# EAGLE board Board1 (EAGLE 9.3.2)
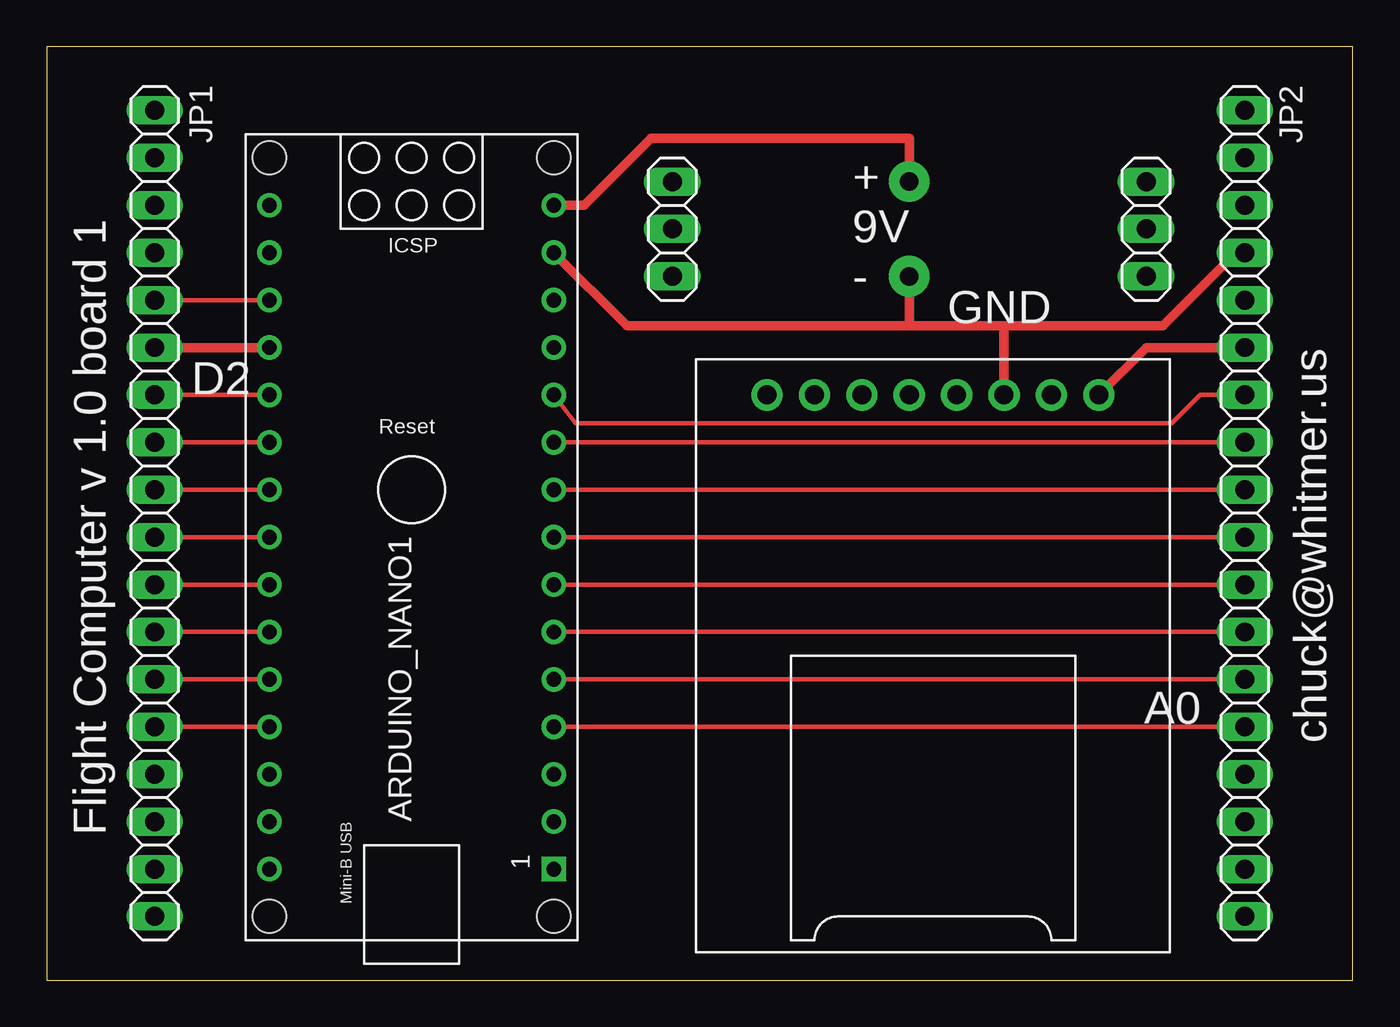
[diagram p0: board, top side]
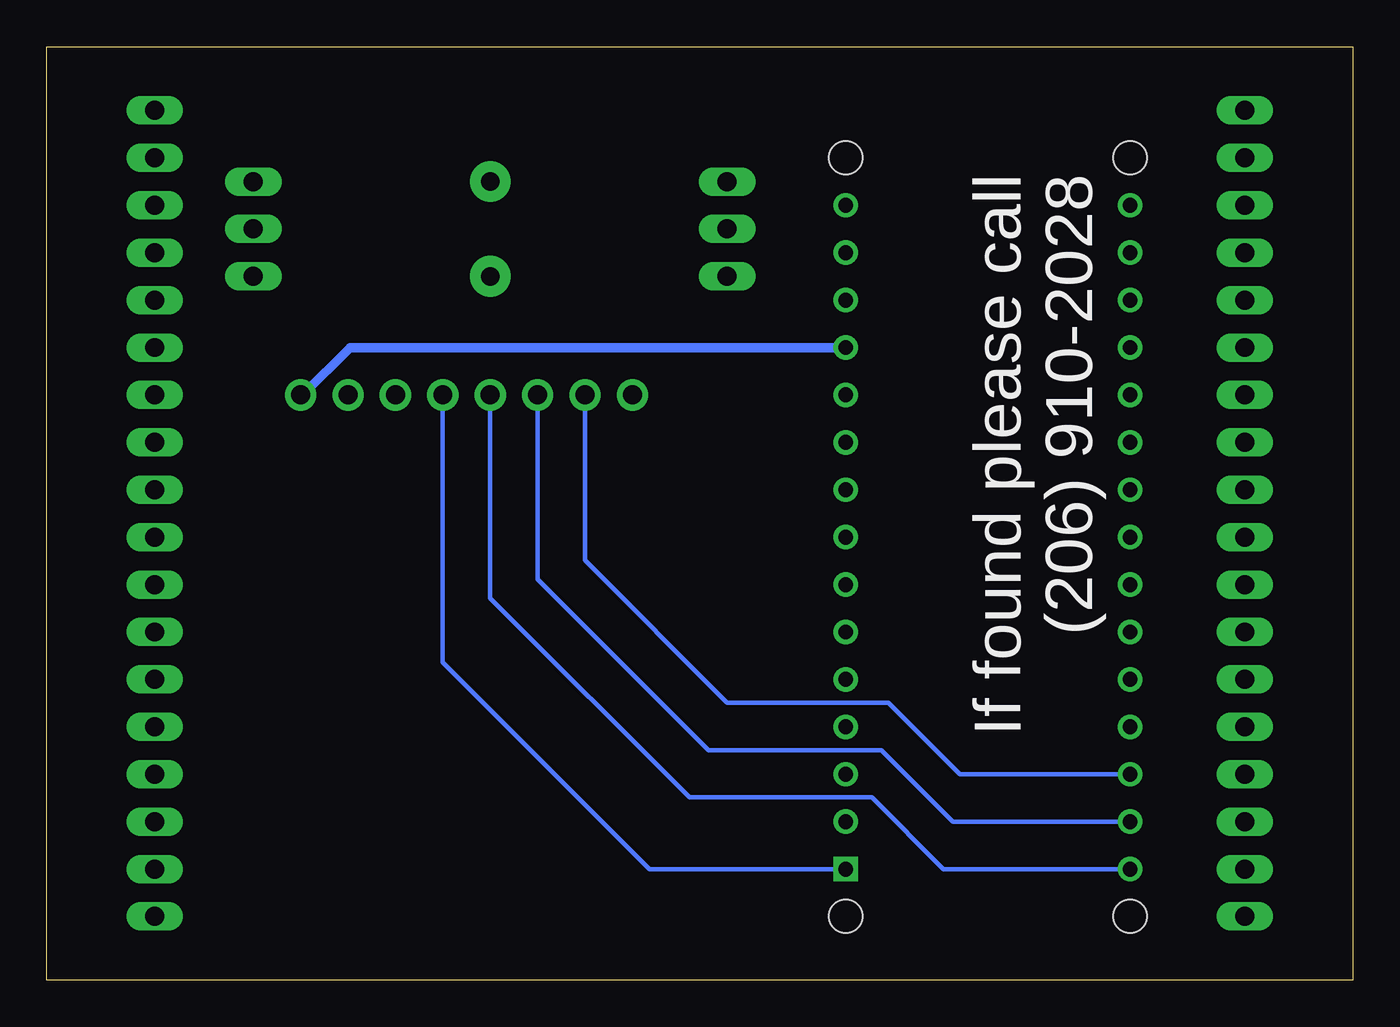
[diagram p1: board, bottom side, seen from below]

Size 70 x 50 mm. Coordinates in mm from the lower left corner, seen from the top.
Outline: 0,0 70,0 70,50 0,50 0,0
Copper layers (1*16): Top 0.035mm / dielectric 1.5mm / Bottom 0.035mm
Design rules "default": minimum track width 6mil, minimum drill 0.35mm, track to track 6mil, track to pad 6mil, pad to pad 6mil, via to via 6mil, smd to smd 6mil, copper to edge 40mil, drill to drill 6mil, minimum pad ring 10mil, minimum via ring 8mil, stop-mask expansion 4mil, vias tented up to drill 0mil, thermal gap 10mil
Net classes: 1 power: width 0.508 mm

## Footprints (pad centres in the part's own frame; a part is rotated, then mirrored left to right if it is on the bottom)
ARDUINO_NANO = drill 0.8 square: 1 -20.32,-7.62 | drill 0.8: 2 -17.78,-7.62; 3 -15.24,-7.62; 4 -12.7,-7.62; 5 -10.16,-7.62; 6 -7.62,-7.62; 7 -5.08,-7.62; 8 -2.54,-7.62; 9 0,-7.62; 10 2.54,-7.62; 11 5.08,-7.62; 12 7.62,-7.62; 13 10.16,-7.62; 14 12.7,-7.62; 15 15.24,-7.62; 16 15.24,7.62; 17 12.7,7.62; 18 10.16,7.62; 19 7.62,7.62; 20 5.08,7.62; 21 2.54,7.62; 22 0,7.62; 23 -2.54,7.62; 24 -5.08,7.62; 25 -7.62,7.62; 26 -10.16,7.62; 27 -12.7,7.62; 28 -15.24,7.62; 29 -17.78,7.62; 30 -20.32,7.62 | hole 1.778: -22.86,-7.62; -22.86,7.62; 17.78,7.62; 17.78,-7.62
BAT9V = drill 1 pad 2.184: NEG -2.54,0; POS 2.54,0
1X18 = drill 1.016 long: 1 -21.59,0; 2 -19.05,0; 3 -16.51,0; 4 -13.97,0; 5 -11.43,0; 6 -8.89,0; 7 -6.35,0; 8 -3.81,0; 9 -1.27,0; 10 1.27,0; 11 3.81,0; 12 6.35,0; 13 8.89,0; 14 11.43,0; 15 13.97,0; 16 16.51,0; 17 19.05,0; 18 21.59,0
1X03 = drill 1.016 long: 1 -2.54,0; 2 0,0; 3 2.54,0
ADA254 = drill 1.016 pad 1.676: 3V 13.97,-6.35; 5V 13.97,-8.89; CD 13.97,8.89; CLK 13.97,-1.27; CS 13.97,6.35; DI 13.97,3.81; DO 13.97,1.27; GND 13.97,-3.81

## Placement (x,y rotation side)
ARDUINO_NANO1  [ARDUINO_NANO]  19.56,26.26 90 top
BAT1  BAT9V  [BAT9V]  46.23,40.23 90 top
JP1  [1X18]  5.79,24.99 270 top
JP2  [1X18]  64.21,24.99 270 top
JP3  [1X03]  33.53,40.23 90 top
JP4  [1X03]  58.93,40.23 90 top
USD1  ADA254  [ADA254]  47.5,17.37 90 top

## Library data of the parts
ARDUINO_NANO1 = ArduinoNanoV30
BAT1 USD1 = cwParts
JP1-JP4 = pinhead

## Nets
5V [power]: ARDUINO_NANO1.12 JP2.6 USD1.5V
A0: ARDUINO_NANO1.4 JP2.14
A1: ARDUINO_NANO1.5 JP2.13
A2: ARDUINO_NANO1.6 JP2.12
A3: ARDUINO_NANO1.7 JP2.11
A4: ARDUINO_NANO1.8 JP2.10
A5: ARDUINO_NANO1.9 JP2.9
A6: ARDUINO_NANO1.10 JP2.8
A7: ARDUINO_NANO1.11 JP2.7
D2: ARDUINO_NANO1.20 JP1.7
D3: ARDUINO_NANO1.21 JP1.8
D4: ARDUINO_NANO1.22 JP1.9
D5: ARDUINO_NANO1.23 JP1.10
D6: ARDUINO_NANO1.24 JP1.11
D7: ARDUINO_NANO1.25 JP1.12
D8: ARDUINO_NANO1.26 JP1.13
D9: ARDUINO_NANO1.27 JP1.14
GND1: ARDUINO_NANO1.19 JP1.6
GND2 [power]: ARDUINO_NANO1.14 BAT1.NEG JP2.4 USD1.GND
N$3: ARDUINO_NANO1.1 USD1.CLK
N$4: ARDUINO_NANO1.30 USD1.DO
N$5: ARDUINO_NANO1.29 USD1.DI
N$6: ARDUINO_NANO1.28 USD1.CS
N$16 [power]: ARDUINO_NANO1.15 BAT1.POS
RST: ARDUINO_NANO1.18 JP1.5

## Tracks (layer width: path | path; a pad name or v marks a point on that pad's centre or on a via)
5V
  Top 0.508: USD1.5V 58.93,33.88 JP2.6
  Bottom 0.152: 56.29,31.34 USD1.5V
  Bottom 0.508: ARDUINO_NANO1.12 53.75,33.88 56.29,31.34
A0
  Top 0.254: JP2.14 ARDUINO_NANO1.4
A1
  Top 0.254: ARDUINO_NANO1.5 JP2.13
A2
  Top 0.254: ARDUINO_NANO1.6 JP2.12
A3
  Top 0.254: JP2.11 ARDUINO_NANO1.7
A4
  Top 0.254: ARDUINO_NANO1.8 JP2.10
A5
  Top 0.254: ARDUINO_NANO1.9 JP2.9
A6
  Top 0.254: ARDUINO_NANO1.10 JP2.8
A7
  Top 0.254: ARDUINO_NANO1.11 28.35,29.82 60.3,29.82 61.82,31.34 JP2.7
D2
  Top 0.254: JP1.7 ARDUINO_NANO1.20
D3
  Top 0.254: JP1.8 ARDUINO_NANO1.21
D4
  Top 0.254: JP1.9 ARDUINO_NANO1.22
D5
  Top 0.254: JP1.10 ARDUINO_NANO1.23
D6
  Top 0.254: JP1.11 ARDUINO_NANO1.24
D7
  Top 0.254: JP1.12 ARDUINO_NANO1.25
D8
  Top 0.254: JP1.13 ARDUINO_NANO1.26
D9
  Top 0.254: JP1.14 ARDUINO_NANO1.27
GND1
  Top 0.508: JP1.6 ARDUINO_NANO1.19
GND2
  Top 0.152: 63.73,38.96 JP2.4
  Top 0.508: ARDUINO_NANO1.14 31.09,35.05 46.23,35.05 | 46.23,35.05 51.31,35.05 | 51.31,35.05 59.82,35.05 63.73,38.96 | BAT1.NEG 46.23,35.05 | USD1.GND 51.31,35.05
N$3
  Bottom 0.254: ARDUINO_NANO1.1 37.69,5.94 48.77,17.02 USD1.CLK
N$4
  Bottom 0.254: ARDUINO_NANO1.30 21.95,5.94 25.78,9.78 35.56,9.78 46.23,20.45 USD1.DO
N$5
  Bottom 0.254: ARDUINO_NANO1.29 21.44,8.48 25.27,12.32 34.54,12.32 43.69,21.46 USD1.DI
N$6
  Bottom 0.254: ARDUINO_NANO1.28 21.06,11.02 24.89,14.86 33.53,14.86 41.15,22.48 USD1.CS
N$16
  Top 0.508: ARDUINO_NANO1.15 28.8,41.5 32.38,45.09 46.23,45.09 BAT1.POS
RST
  Top 0.254: JP1.5 ARDUINO_NANO1.18

## Text on the board
tPlace: + / 9V / - | GND | D2 | A0 | chuck@whitmer.us | Flight Computer v 1.0 board 1
bPlace: If found please call / (206) 910-2028